# Altium PCB Senior design LED matrix 3.0.PcbDoc
Units mil, origin at the board's own origin, x right, y up, seen from the top; angles counter-clockwise.
Board outline 6595 x 3925 mil, 2 copper layers (Top Layer, Bottom Layer); 20 components, 68 nets, 198 pads, 31 vias.
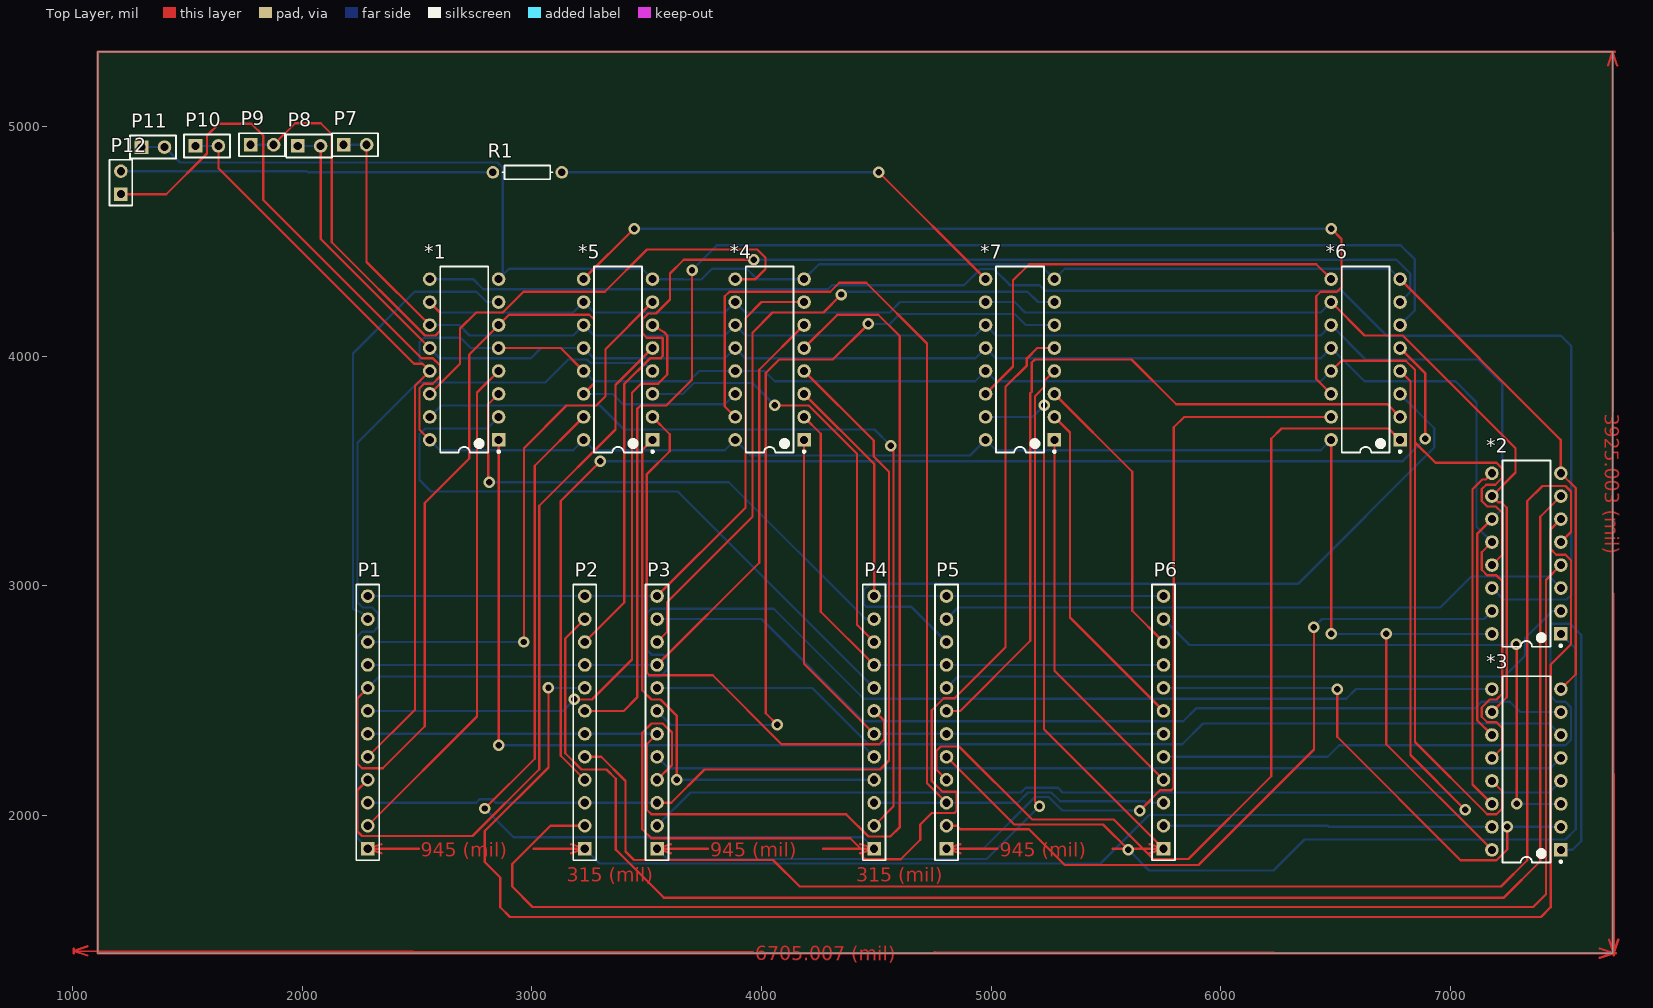
[diagram p0: Top Layer view]
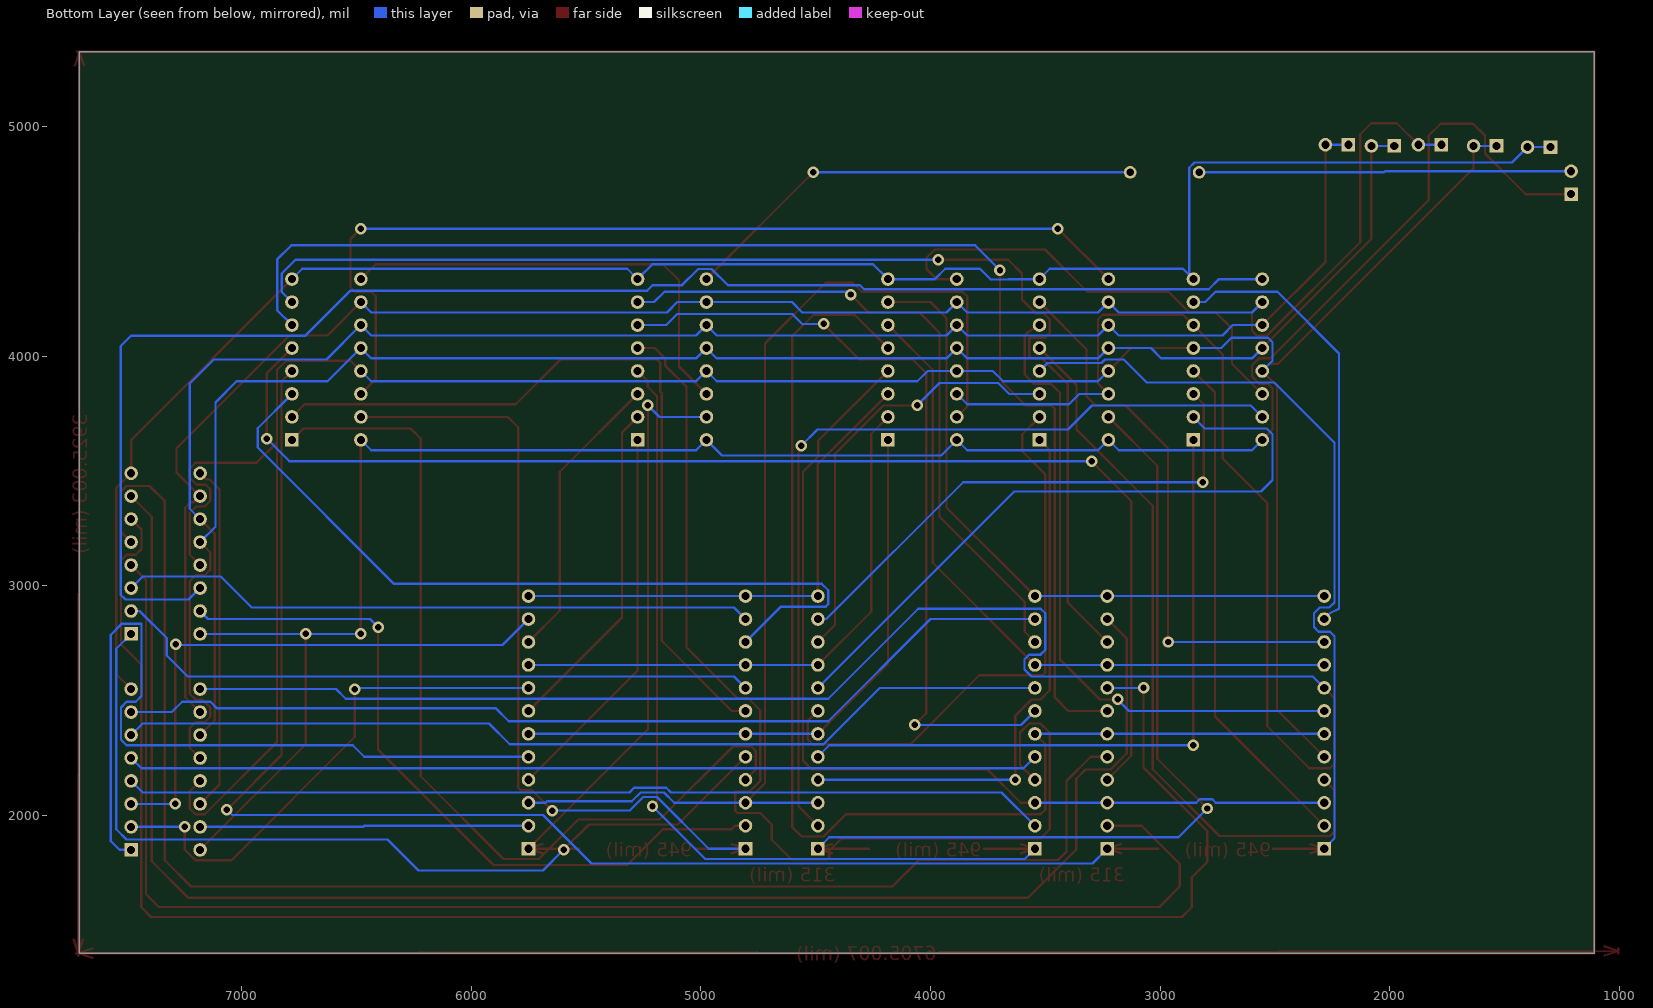
[diagram p1: Bottom Layer view, seen from below]

## Layer stack, top to bottom
Top Solder: solder mask 0.4, Solder Resist, Dk 3.5
Top Layer: signal copper 1.4
Dielectric 1: dielectric 12.6, FR-4, Dk 4.8
Bottom Layer: signal copper 1.4
Bottom Solder: solder mask 0.4, Solder Resist, Dk 3.5

## Board outline
1110,1400 1110,5325 7705,5325 7705,1400

## Design rules (kind name [scope] priority, off if disabled: settings)
Clearance [All] p1: gap=10
PolygonConnect [All] p1: connectstyle=Relief reliefconductorwidth=10 reliefentries=4 polygonreliefangle="90 Angle" airgapwidth=10
RoomDefinition "Senior design LED matrix 3.0" [InComponentClass('Senior design LED matrix 3.0')] p1: confinementstyle=ConfineIn formatcopy=TRUE lockcomponents=FALSE outline 1115,1420 7715,1420 7715,5325.01 1115,5325.01
RoutingVias [All] p1: holewidth=28 width=50 viastyle="Through Hole" minholewidth=28 minwidth=50 maxholewidth=28 maxwidth=50
SolderMaskExpansion [All] p1: expansion=4
Width [All] p1: maxlimit=10 minlimit=10 preferedwidth=10
30 further rules are at their usual default settings.

## Components (designator, comment, footprint, x,y, rotation, side; value= is the part's Value field where it differs from the comment)
*1 "Red_1" DIP-16 2705,3985 r180 top
*2 "Red_2" DIP-16 7330,3140 r180 top
*3 "Red_3" DIP-16 7330,2200 r180 top
*4 "Ground" DIP-16 4035,3985 r180 top
*5 "Green_1" DIP-16 3375,3985 r180 top
*6 "Green_2" DIP-16 6630,3985 r180 top
*7 "Green_3" DIP-16 5125,3985 r180 top
P1 "Header 12" HDR1X12 2285,1855 r90 top
P2 "Header 12" HDR1X12 3230,1855 r90 top
P3 "Header 12" HDR1X12 3545,1855 r90 top
P4 "Header 12" HDR1X12 4490,1855 r90 top
P5 "Header 12" HDR1X12 4805,1855 r90 top
P6 "Header 12" HDR1X12 5750,1855 r90 top
P7 "11" HDR1X2 2180,4920 r0 top
P8 "12" HDR1X2 1980,4915 r0 top
P9 "10" HDR1X2 1775,4920 r0 top
P10 "13" HDR1X2 1535,4915 r0 top
P11 "Ground 8" HDR1X2 1300,4910 r0 top
P12 "1 (Power) 2 (Ground)" HDR1X2 1210,4705 r90 top
R1 "Res1" AXIAL-0.3 2980,4800 r180 top

## Footprints (in the part's own frame and the unit in brackets; to place one, negate y for a bottom-side part, rotate by r counter-clockwise, add the part's x,y. Pads: shape width x height; smd on the part's side, far side on the other; paste and mask are expansions set on the pad)
AXIAL-0.3 [mm] "Axial Device, Thru-Hole; 2 Leads; 0.3 in Pin Spacing"
  round 1.4 hole 0.85: 1(-3.81,0) 2(3.81,0)
  silkscreen extent -2.77,-0.76 2.77,0.76
DIP-16 [mm] "DIP; 16 Leads; Row Spacing 7.62 mm; Pitch 2.54 mm"
  rect 1.5x1.5 hole 0.9: 1(-3.81,8.89)
  round 1.5 hole 0.9: 2(-3.81,6.35) 3(-3.81,3.81) 4(-3.81,1.27) 5(-3.81,-1.27) 6(-3.81,-3.81) 7(-3.81,-6.35) 8(-3.81,-8.89) 9(3.81,-8.89) 10(3.81,-6.35) 11(3.81,-3.81) 12(3.81,-1.27) 13(3.81,1.27) 14(3.81,3.81) 15(3.81,6.35) 16(3.81,8.89)
  silkscreen extent -3.94,-10.3 2.65,10.31, body extent -3.6,-10.28 3.6,10.28, height 5.08
HDR1X2 [mm] "Connector; Header; 2 Position"
  rect 1.5x1.5 hole 0.9: 1(0,0)
  round 1.5 hole 0.9: 2(2.54,0)
  silkscreen extent -1.27,-1.27 3.81,1.27
HDR1X12 [mm] "Connector; Header; 12 Position"
  rect 1.5x1.5 hole 0.9: 1(0,0)
  round 1.5 hole 0.9: 2(2.54,0) 3(5.08,0) 4(7.62,0) 5(10.16,0) 6(12.7,0) 7(15.24,0) 8(17.78,0) 9(20.32,0) 10(22.86,0) 11(25.4,0) 12(27.94,0)
  silkscreen extent -1.27,-1.27 29.21,1.27

## Part data
*1 *2 *3 *4 *5 *6 *7: library part Component_1
P1 P2 P3 P4 P5 P6: "Header, 12-Pin"
P7 P8 P9 P10 P11 P12: library part "Header 2", "Header, 2-Pin"
R1: "Resistor"

## Via types
v1: diameter 50, hole 28, Top Layer to Bottom Layer, 31 vias

## Nets (pads, with @x,y where several pads share a name; then routed paths per layer and width w, separated by ;. In a path a pad name is that pad's centre, name@x,y a point inside that pad or via, vN(x,y) a via of type N, cw(c..) or ccw(c..) an arc to the next point about the centre after c; other vN are vias at no path point)
Net*1_1: *1.1 P4.5 | length 2985.7
  Top Layer w10: v1(2855,2305) *1.1
  Bottom Layer w10: v1(2855,2305) 4440,2305 P4.5
Net*1_2: *1.2 P4.8 | length 2930.9
  Bottom Layer w10: *1.2 2805,3685 2535,3685 2510,3660 2510,3460 2560,3410 3635,3410 P4.8
Net*1_3: *1.3 P4.11 | length 2326.6
  Top Layer w10: v1(2815,3451) 2810,3456 2810,3790 *1.3
  Bottom Layer w10: v1(2815,3451) 3857.11,3451 4453.11,2855 P4.11
Net*1_4: *1.4 P1.2 | length 2216.1
  Top Layer w10: P1.2 2761,2431 2761,3841 *1.4
Net*1_5: *1.5 *1.13 *2.13 *3.13 *4.13 *5.13 *6.13 *7.13 P1.5 P10.1 P10.2 | length 11232.9
  Top Layer w10: P10.2 1635,4818.11 2486.56,3966.56 2523.44,3966.56 *1.13 2490.47,3870.47 2490.47,2460.47 P1.5 ; *1.5 3125,4035 *5.13 ; *6.13 6525,3980 6805,3980 6845,3940 6845,3624 ; *3.13 7225,2105 7225,2030 7200,2005 7160,2005 6845,2320 6845,3624 ; *2.13 7224.53,3134.53 7224.53,3317.47 7197,3345 7160,3345 7135,3370 7135,3420 7155,3440 7194.53,3440 7225,3470.47 7225,3510 7200,3535 6934,3535 6845,3624
  Bottom Layer w10: P10.1 P10.2 ; *1.13 2510,3980 2510,4060 2530,4080 2689,4080 2734,4035 *1.5 ; *5.13 3270,3890 3683,3890 3728,3935 *4.13 4012,3935 4057,3890 4930,3890 *7.13 5020,3890 6435,3890 *6.13
Net*1_6: *1.6 *3.9 *4.14 *5.14 P1.8 | length 9606.7
  Top Layer w10: P1.8 2240,2510 2240,2225 2260,2205 2350,2205 2533,2388 2533,3360 2727,3554 2727,4007 *1.6 2900,4180 3250,4180 3270,4160 3270,3880 *5.14
  Bottom Layer w10: P1.8 2335,2605 3560,2605 3590,2635 3590,2680 3570,2700 3520,2700 3500,2720 3500,2880 3520,2900 4053,2900 4445,2508 6546,2508 6588,2550 *3.9 ; *5.14 3352,3835 3397,3790 3840,3790 *4.14
Net*1_7: *1.7 P1.11 | length 1955.6
  Bottom Layer w10: P1.11 2258.72,2881.28 2220.47,2900 2220.47,4011.47 2489,4280 2758.21,4280 2803.21,4235 *1.7
Net*1_8: *1.8 *2.8 *3.8 *4.8 *5.8 *6.8 *7.8 P11.1 P11.2 | length 8333.3
  Top Layer w10: *6.8 7480,3635 *2.8 7544.53,3425.47 7544.53,2614.53 *3.8
  Bottom Layer w10: P11.1 P11.2 1467,4843 2850,4843 2873,4820 *1.8@2873,4353 ; *6.8 6735,4380 5320,4380 *7.8 5210.47,4399.53 4249.53,4399.53 *4.8 3980.31,4335 3935.31,4380 3784.15,4380 3737.6,4333.45 3659.15,4333.45 3657.6,4335 *5.8 3480,4380 2900,4380 *1.8@2873,4353 ; *1.8@2873,4353 2873,4335 *1.8 *1.8@2873,4353
Net*1_9: *1.9 *2.14 | length 6622.3
  Bottom Layer w10: *1.9 2743.47,4335 2788,4290.47 4289.47,4290.47 4307,4308 4881,4308 4952.53,4379.53 5010.47,4379.53 5081,4309 5209,4309 5233,4285 6525,4285 6721,4089 7480,4089 7525,4044 7525,2960 7505,2940 7230,2940 *2.14
Net*1_10: *1.10 *2.10 *3.10 *4.10 *5.10 *6.10 *7.10 P9.1 P9.2 | length 8068.1
  Top Layer w10: P9.2 1969,5014 2080,5014 2128,4966 2128,4496 2534,4090 2580,4090 2600,4110 2600,4190 *1.10 ; *6.10 6625,4090 6792,4090 7283,3599 7283,3493 *2.10 7206.28,3363.72 7220.8,3363.72 7244.53,3340 7244.53,2514.53 *3.10
  Bottom Layer w10: P9.1 P9.2 ; *1.10 2600,4190 3180,4190 *5.10 3270,4190 3840,4190 *4.10 3930,4190 4558,4190 4603,4235 *7.10 5102,4235 5147,4190 6435,4190 *6.10
Net*1_11: *1.11 *2.11 *3.11 *4.11 *5.11 *6.11 *7.11 P7.1 P7.2 | length 7525.7
  Top Layer w10: P7.2 2280,4410 *1.11 ; *3.11 7115.47,2414.53 7115.47,3225.47 *2.11
  Bottom Layer w10: P7.1 P7.2 ; *1.11 2683,4135 2728,4090 3180,4090 *5.11 3270,4090 3840,4090 *4.11 3930,4090 4930,4090 *7.11 5020,4090 6435,4090 *6.11 6630,3985 7120,3985 7225,3880 7225,3335 *2.11
Net*1_12: *1.12 *2.12 *3.12 *4.12 *5.12 *6.12 *7.12 P8.1 P8.2 | length 7769.9
  Top Layer w10: P8.2 2080,4510 *1.12 ; *3.12 7225,2295 7225,2380.47 7200,2405.47 7160,2405.47 7135.47,2430 7135.47,2470 7170.47,2505 7200,2505 7224.53,2529.53 7224.53,3020.47 7200,3045 7160,3045 7135.47,3069.53 7135.47,3145.47 *2.12
  Bottom Layer w10: P8.1 P8.2 ; *1.12 2600,3990 2995,3990 3040,4035 *5.12 3270,3990 3840,3990 *4.12 3930,3990 4930,3990 *7.12 5020,3990 6435,3990 *6.12 6625,3890 7021,3890 7113,3798 7113,3257 *2.12
Net*1_14: *1.14 *4.9 | length 2026.3
  Top Layer w10: *1.14 2687,3967 2687,4120 2757,4190 2873,4190 2963,4280 3317,4280 3501,4464 3981,4464 4017,4428 4017,4379 3973,4335 *4.9
Net*1_15: *1.15 P4.2 | length 3795.4
  Top Layer w10: P4.2 4574.53,2039.53 4574.53,3597.47 v1(4562,3610)
  Bottom Layer w10: *1.15 2605,3785 3296,3785 3401,3680 4492,3680 v1(4562,3610)
Net*1_16: *1.16 *2.16 *3.16 *4.16 *5.16 *6.16 *7.16 P12.1 | length 9333.7
  Top Layer w10: P12.1 1408,4705 1585,4882 1585,4960 1637,5012 1778,5012 1830,4960 1830,4680 2520,3990 2569.53,3990 2599.53,3960 2599.53,3910.53 2568.53,3879.53 2530,3879.53 2510.47,3860 2510.47,3679.53 *1.16 ; v1(6480,2790) *6.16 ; v1(6720,2790) 6720,2310 *3.16
  Bottom Layer w10: *1.16 2600,3590 3180,3590 *5.16 3270,3590 3840,3590 *4.16 3952.98,3567.02 4907.02,3567.02 *7.16 5020,3590 6435,3590 *6.16 ; v1(6480,2790) v1(6720,2790) *2.16
Net*2_1: *2.1 P5.5 | length 3896.1
  Top Layer w10: P5.5 5100,1960 5487,1960 v1(5597,1850)
  Bottom Layer w10: v1(5597,1850) 5687,1760 6229,1760 6364,1895 7500,1895 7544.53,1939.53 7544.53,2725.47 *2.1
Net*2_2: *2.2 P5.8 | length 2857.8
  Bottom Layer w10: P5.8 4855,2605 7233.21,2605 7325,2696.79 7325,2771.89 7443.11,2890 *2.2
Net*2_3: *2.3 P5.11 | length 2772.3
  Bottom Layer w10: P5.11 4855,2905 6955,2905 7090,3040 7430,3040 *2.3
Net*2_4: *2.4 P2.2 | length 6504.7
  Top Layer w10: P2.2 3081,1955 2914,1788 2914,1690 3003,1601 7360,1601 7415.47,1656.47 7415.47,3025.47 *2.4
Net*2_5: *2.5 P2.5 | length 6595.5
  Top Layer w10: P2.5 3302,2255 3407,2150 3407,1843 3444,1806 4050,1806 4166,1690 7219,1690 7334,1805 7334,3368.53 7400,3434.53 7500,3434.53 7524.53,3410 7524.53,3234.53 *2.5
Net*2_6: *2.6 P2.8 | length 7669.8
  Top Layer w10: v1(3072,2555) 3072,2209 2795,1932 2795,1797 2862,1730 2862,1600 2904,1558 7393.47,1558 7435.47,1600 7435.47,2655.94 7524.53,2745 7524.53,3110.47 7500,3135 7460,3135 7435,3160 7435,3245 *2.6
  Bottom Layer w10: v1(3072,2555) P2.8
Net*2_7: *2.7 P2.11 | length 6998.5
  Top Layer w10: P2.11 3145,2770 3145,2271 3216,2200 3325,2200 3365,2160 3365,1851 3574,1642 7232,1642 7390,1800 7390,3300 *2.7
Net*2_9: *2.9 *3.14 | length 1518.8
  Top Layer w10: *3.14 7095.47,2134.53 7095.47,3420.47 7137.97,3462.97 7152.97,3462.97 *2.9
Net*2_15: *2.15 P5.2 | length 3216.2
  Top Layer w10: P5.2 4850.54,1955 4865.54,1940 5164,1940 5320,1784 5902,1784 6405,2287 v1(6405,2820)
  Bottom Layer w10: v1(6405,2820) 6440,2855 7145,2855 *2.15
Net*3_1: *3.1 P6.5 | length 3528.4
  Bottom Layer w10: P6.5 6465,2255 6515,2305 7500,2305 7524.53,2329.53 7524.53,2470 7500,2494.53 7460,2494.53 7435,2519.53 7435,2835 7520,2835 7569,2786 7569,1888 7531,1850 *3.1
Net*3_2: *3.2 P6.8 | length 2280
  Top Layer w10: v1(6506,2550) 6506,2342 7043,1805 7200,1805 7247,1852 v1(7247,1950)
  Bottom Layer w10: P6.8 6501,2555 v1(6506,2550) ; v1(7247,1950) *3.2
Net*3_3: *3.3 P6.11 | length 2472.7
  Top Layer w10: v1(7285,2746) 7288,2743 v1(7288,2050)
  Bottom Layer w10: P6.11 5863,2742 7281,2742 v1(7285,2746) ; v1(7288,2050) *3.3
Net*3_4: *3.4 P3.2 | length 4032.3
  Bottom Layer w10: P3.2 3690,2100 5130,2100 5150,2120 5290,2120 5310,2100 7430,2100 *3.4
Net*3_5: *3.5 P3.5 | length 3974.4
  Bottom Layer w10: P3.5 3595,2205 7435,2205 *3.5
Net*3_6: *3.6 P3.8 | length 4094.5
  Bottom Layer w10: P3.8 4221,2555 4466,2310 5832,2310 5922,2400 7430,2400 *3.6
Net*3_7: *3.7 P3.11 | length 4173.2
  Bottom Layer w10: P3.11 4000,2855 4445,2410 5836,2410 5892,2466 7106,2466 7135,2495 7258,2495 7303,2450 *3.7
Net*3_15: *3.15 P6.2 | length 1432.1
  Bottom Layer w10: P6.2 6465,1955 6470,1950 *3.15
Net*4_1: *4.1 P4.6 P5.6 P6.6 | length 2666.3
  Top Layer w10: *4.1 4185,2660 P4.6
  Bottom Layer w10: P4.6 P5.6 P6.6
Net*4_2: *4.2 P4.9 P5.9 P6.9 | length 2466.3
  Top Layer w10: *4.2 4258,3662 4258,2887 P4.9
  Bottom Layer w10: P4.9 P5.9 P6.9
Net*4_3: *4.3 P4.12 P5.12 P6.12 | length 2266.3
  Top Layer w10: *4.3 4490,3530 P4.12
  Bottom Layer w10: P4.12 P5.12 P6.12
Net*4_4: *4.4 P1.3 P2.3 P3.3 | length 4207.6
  Top Layer w10: P3.3 3606.74,2055 3751.74,2200 4515,2200 4554.53,2239.53 4554.53,3496.47 4488,3563 4488,3632 *4.4
  Bottom Layer w10: P1.3 2757,2055 2772.83,2070.83 2827,2070.83 2842.83,2055 P2.3 P3.3
Net*4_5: *4.5 P1.6 P2.6 P3.6 | length 5428.5
  Top Layer w10: P3.6 3500,2310 3500,2025 3520,2005 4368,2005 4465,1908 4560,1908 4602,1950 4602,4086 4508,4180 4330,4180 *4.5
  Bottom Layer w10: P1.6 P2.6 P3.6
Net*4_6: *4.6 P1.9 P2.9 P3.9 | length 3005.1
  Top Layer w10: P3.9 3990,3100 3990,3940 *4.6
  Bottom Layer w10: P1.9 P2.9 P3.9
Net*4_7: *4.7 P1.12 P2.12 P3.12 | length 2913.5
  Top Layer w10: P3.12 3930,3340 3930,4165 4000,4235 *4.7
  Bottom Layer w10: P1.12 P2.12 P3.12
Net*4_15: *4.15 P4.3 P5.3 P6.3 | length 4889.9
  Top Layer w10: *4.15 3840,3780 3840,4260 3860,4280 4298.84,4280 4337.84,4319 4456,4319 4720.47,4054.53 4720.47,2139.53 P5.3
  Bottom Layer w10: P4.3 P5.3 5115,2055 5160,2100 5261.46,2100 5300,2061.46 5669,2061.46 5675.46,2055 P6.3
Net*5_1: *5.1 P4.4 | length 2443.8
  Top Layer w10: *5.1 3480.47,3590.47 3480.47,2544.53 3520,2505 3560,2505 3630,2435 v1(3630,2155)
  Bottom Layer w10: v1(3630,2155) P4.4
Net*5_2: *5.2 P4.7 | length 2500
  Top Layer w10: *5.2 3600,3660 3600,3586 3500.47,3486.47 3500.47,2620 3510.47,2610 3787,2610 4087,2310 4512,2310 4534.53,2332.53 4534.53,2410.47 P4.7
Net*5_3: *5.3 P4.10 | length 1888.5
  Top Layer w10: v1(4058,3785) 4205,3785 4415,3575 4415,2830 P4.10
  Bottom Layer w10: *5.3 3657,3835 3705,3883 3960,3883 v1(4058,3785)
Net*5_4: *5.4 P1.1 | length 3369.8
  Bottom Layer w10: P1.1 2240,1900 2240,2780 2260,2800 2310,2800 2330,2820 2330,2880 2305,2905 2263,2905 2240.47,2927.53 2240.47,3622.47 2503,3885 3058,3885 3158,3985 3240,3985 3255,3970 3490,3970 *5.4
Net*5_5: *5.5 P1.4 | length 3202.7
  Top Layer w10: P1.4 2240,2110 2240,1930 2260,1910 2741,1910 3032,2201 3032,3348.27 3364,3680.27 3364,3874 *5.5
Net*5_6: *5.6 P1.7 | length 2840.8
  Top Layer w10: v1(3185,2505) 3262,2505 3436,2679 3436,3840 3476,3880 3550,3880 3589.53,3919.53 3589.53,4090 3574.53,4105 *5.6
  Bottom Layer w10: P1.7 3135,2455 v1(3185,2505)
Net*5_7: *5.7 P1.10 | length 2467.5
  Top Layer w10: v1(2965,2755) 2965,3599 3151,3785 3280,3785 3320,3825 3320,4030 *5.7
  Bottom Layer w10: P1.10 v1(2965,2755)
Net*5_9: *5.9 *6.14 | length 4198.3
  Top Layer w10: *5.9 v1(3445,4555) ; *6.14 6415,3900 6415,4260 6435,4280 6505,4280 6525,4300 6525,4510 v1(6480,4555)
  Bottom Layer w10: v1(3445,4555) v1(6480,4555)
Net*5_15: *5.15 P4.1 | length 3650.6
  Top Layer w10: v1(2795,2030) 3012,2247 3012,3522 *5.15
  Bottom Layer w10: v1(2795,2030) 2920,1905 4440,1905 P4.1
Net*6_1: *6.1 P5.4 | length 4032.7
  Top Layer w10: P5.4 4760.47,2199.53 4760.47,2280 4780.47,2300 4860,2300 5178,1982 5533,1982 5705,1810 5859,1810 6219,2170 6219,3640 6264,3685 6730,3685 *6.1
Net*6_2: *6.2 P5.7 | length 3418.2
  Top Layer w10: P5.7 4864.97,2455 5170,2760.03 5170,3838.59 5176.41,3845 5176.41,3971.41 5190,3985 5610,3985 5805,3790 6725,3790 *6.2
Net*6_3: *6.3 P5.10 | length 3524.7
  Bottom Layer w10: P5.10 4651,2909 4456,2909 4445,2920 4445,2980 4473,3008 6335,3008 6929,3602 6929,3686 *6.3
Net*6_4: *6.4 P2.1 | length 5984.1
  Top Layer w10: *6.4 6825,3890 6825,2263 v1(7063,2025)
  Bottom Layer w10: P2.1 3294.53,1790.47 5476.01,1790.47 5687,2001.46 7039.46,2001.46 v1(7063,2025)
Net*6_5: *6.5 P2.4 | length 5573.9
  Top Layer w10: P2.4 3125,2260 3125,3369 v1(3298,3542) ; *6.5 6889,3926 v1(6889,3640)
  Bottom Layer w10: v1(3298,3542) 6791,3542 v1(6889,3640)
Net*6_6: *6.6 P2.7 | length 5807
  Top Layer w10: P2.7 3400,2455 3458,2513 3458,3769 3474,3785 3585,3785 3697,3897 v1(3697,4374)
  Bottom Layer w10: v1(3697,4374) 3805,4482 6783,4482 6844.53,4420.47 6844.53,4199.53 *6.6
Net*6_7: *6.7 P2.10 | length 5335.2
  Top Layer w10: P2.10 3402,2927 3402,3878 3514,3990 3559.53,3990 3569.53,4000 3569.53,4079 3568.53,4080 3500,4080 3480,4100 3480,4159 3506,4185 3540,4185 3601.53,4246.53 3601.53,4360 3661.06,4419.53 v1(3966.47,4419.53)
  Bottom Layer w10: v1(3966.47,4419.53) 6764.47,4419.53 6824.53,4359.47 6824.53,4279.53 *6.7
Net*6_9: *6.9 *7.14 | length 1985.6
  Top Layer w10: *7.14 5094.66,3954.66 5094.66,4329.66 5165,4400 6415,4400 *6.9
Net*6_15: *6.15 P5.1 | length 3422.3
  Top Layer w10: v1(5647,2021) 5736,2110 5785,2110 5795,2120 5795,3690 5840,3735 *6.15
  Bottom Layer w10: P5.1 4965,1855 5190,2080 5250,2080 5309,2021 v1(5647,2021)
Net*7_1: *7.1 P6.4 | length 1676.8
  Top Layer w10: *7.1 5275,2630 P6.4
Net*7_2: *7.2 P6.7 | length 1476.8
  Top Layer w10: *7.2 5343,3667 5343,2862 P6.7
Net*7_3: *7.3 P6.10 | length 1276.8
  Top Layer w10: *7.3 5614,3496 5614,2891 P6.10
Net*7_4: *7.4 P3.1 | length 3717
  Top Layer w10: v1(5210,2040) 5190,2060 5190,3825 5231,3866 5231,3891 *7.4
  Bottom Layer w10: P3.1 3589.53,1810.47 4980.47,1810.47 v1(5210,2040)
Net*7_5: *7.5 P3.4 | length 4768.9
  Top Layer w10: P3.4 3609.53,2219.53 3609.53,2360.47 3570,2400 3520,2400 3480,2360 3480,1940 3520,1900 4386,1900 4440,1846 4440,1819 4450,1809 4606,1809 4691,1894 4691,1960 4741,2010 4840,2010 4850,2020 4850,2100 4847,2103 4787.47,2103 4740.47,2150 4740.47,2457.47 4793,2510 4840,2510 5062,2732 5062,3866 5155,3959 5155,3990 5200,4035 *7.5
Net*7_6: *7.6 P3.7 | length 3485.7
  Top Layer w10: v1(4069,2394) 4018,2445 4018,3926 4077,3985 4310,3985 v1(4465,4140)
  Bottom Layer w10: P3.7 3606,2394 v1(4069,2394) ; v1(4465,4140) 4558,4140 4601,4183 5102,4183 5150,4135 *7.6
Net*7_7: *7.7 P3.10 | length 2926.3
  Top Layer w10: P3.10 3589.53,2799.53 3589.53,2929.53 3960,3300 3960,4102 4048,4190 4269,4190 v1(4347,4268)
  Bottom Layer w10: v1(4347,4268) 4359,4280 5158,4280 5203,4235 *7.7
Net*7_9: *7.9 R1.1 | length 2037.6
  Top Layer w10: v1(4510,4800) *7.9
  Bottom Layer w10: R1.1 v1(4510,4800)
Net*7_15: *7.15 P6.1 | length 2421.1
  Top Layer w10: v1(5230,3785) 5230,2375 P6.1
  Bottom Layer w10: *7.15 5180,3735 v1(5230,3785)
NetP12_2: P12.2 R1.2 | length 1622.1
  Bottom Layer w10: P12.2 2020,4805 2025,4800 R1.2
copper on no net: | length 33866.8
  Top Layer w10: 1004.99,1400 1005.01,1420 ; 1064.97,1389.91 1005,1410 ; 1065.03,1429.91 1005,1410 ; 2285,1845 2285,1865 ; 2345,1835 2285,1855 ; 2345,1875 2285,1855 ; 2506.58,1855 2285,1855 ; 3008.42,1855 3230,1855 ; 3130,1855 3230,1855 ; 3645,1855 3545,1855 ; 3766.58,1855 3545,1855 ; 3961.62,1405.59 1005,1410 ; 4268.42,1855 4490,1855 ; 4390,1855 4490,1855 ; 4753.38,1404.41 7710,1400 ; 4905,1855 4805,1855 ; 5026.58,1855 4805,1855 ; 5528.42,1855 5750,1855 ; 5690,1835 5750,1855 ; 5690,1875 5750,1855 ; 5750,1845 5750,1865 ; 7649.97,1380.09 7710,1400 ; 7650.03,1420.09 7710,1400 ; 7685.08,5264.97 7705,5325 ; 7689.92,1459.97 7710,1400 ; 7695,5324.99 7715,5325.01 ; 7700,1399.99 7720,1400.01 ; 7707,3758.38 7705,5325 ; 7708,2966.62 7710,1400 ; 7709.99,1390 7710.02,1410 ; 7725.08,5265.03 7705,5325 ; 7729.92,1460.03 7710,1400 ; 3230,1855 3170,1835 3230,1855 ; 3230,1855 3170,1875 3230,1855 ; 3545,1855 3605,1835 3545,1855 ; 3545,1855 3605,1875 3545,1855 ; 4490,1855 4430,1835 4490,1855 ; 4490,1855 4430,1875 4490,1855 ; 4805,1855 4865,1835 4805,1855 ; 4805,1855 4865,1875 4805,1855 ; 7705,5325 1110,5325 1110,1400 7705,1400 7705,5325 ; 3230,1845 3230,1865 3230,1845 ; 3545,1845 3545,1865 3545,1845 ; 4490,1845 4490,1865 4490,1845 ; 4805,1845 4805,1865 4805,1845

## Other copper
Top Layer:
  text "3925.003 (mil)" at 7671.02,3748.33 h60 r270.07
  text "945 (mil)" at 2516.58,1819.01 h60
  text "945 (mil)" at 3776.58,1819.01 h60
  text "945 (mil)" at 5036.58,1819.01 h60
  text "315 (mil)" at 3151.57,1711.04 h60
  text "315 (mil)" at 4411.57,1711.04 h60
  text "6705.007 (mil)" at 3971.57,1369.59 h60 r359.91